# Altium PCB YYB_V2.PcbDoc
Units mm, origin at the board's own origin, x right, y up, seen from the top; angles counter-clockwise.
Board outline 18 x 410 mm, 2 copper layers (Top Layer, Bottom Layer); 123 components, 125 nets, 436 pads, 233 vias.
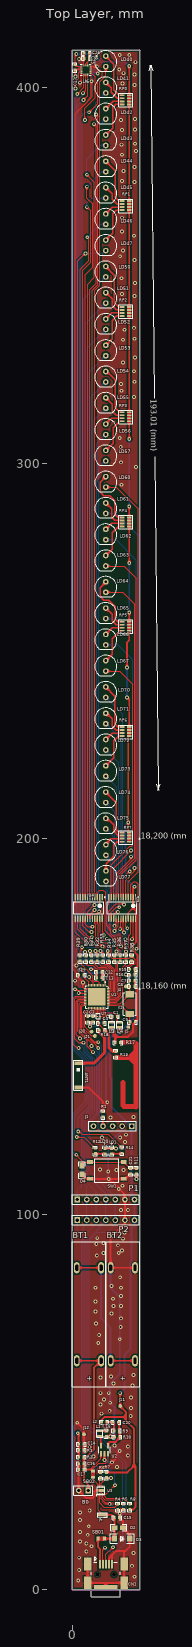
[diagram p0: Top Layer view]
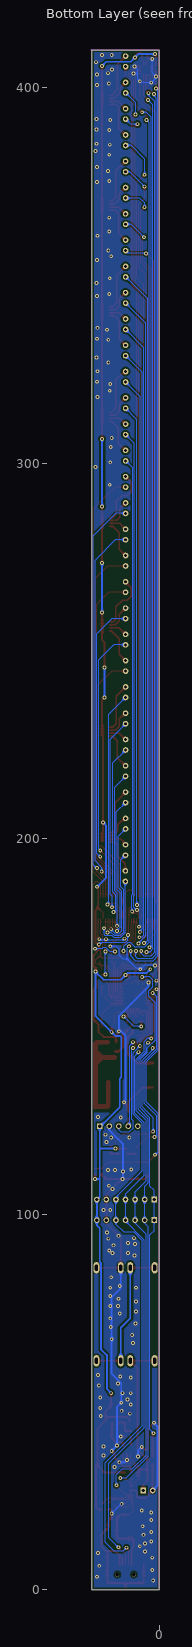
[diagram p1: Bottom Layer view, seen from below]

## Layer stack, top to bottom
Top Solder: solder mask 0.0102, Solder Resist, Dk 3.5
Top Layer: signal copper 0.0356
Dielectric1: dielectric 0.32, FR-4, Dk 4.8
Bottom Layer: signal copper 0.0356
Bottom Solder: solder mask 0.0102, Solder Resist, Dk 3.5

## Board outline
0,0 18,0 18,410 0,410

## Design rules (kind name [scope] priority, off if disabled: settings)
Clearance Poly [InPoly] p1: gap=0.508
Clearance [All] p2: gap=0.178
PolygonConnect via [IsVia] p1: connectstyle=Direct reliefconductorwidth=0.254 reliefentries=4 polygonreliefangle="90 Angle" airgapwidth=0.254
PolygonConnect [All] p2: connectstyle=Relief reliefconductorwidth=0.254 reliefentries=4 polygonreliefangle="90 Angle" airgapwidth=0.254
RoomDefinition power [InComponentClass('power')] p1: confinementstyle=ConfineIn formatcopy=TRUE lockcomponents=FALSE outline 0,-0.381 18.034,-0.381 18.034,105.537 0,105.537
RoomDefinition MCU_BT [InComponentClass('MCU_BT')] p2: confinementstyle=ConfineIn formatcopy=TRUE lockcomponents=FALSE outline 0,105.664 18,105.664 18,186.699 0,186.699
RoomDefinition Leds [InComponentClass('Leds')] p3: confinementstyle=ConfineIn formatcopy=TRUE lockcomponents=FALSE outline 0,187 18,187 18,409.956 0,409.956
RoutingVias [All] p1: holewidth=0.508 width=1.016 viastyle="Through Hole" minholewidth=0.381 minwidth=0.762 maxholewidth=0.711 maxwidth=1.27
SolderMaskExpansion [All] p1: expansion=0.102
Width [All] p1: maxlimit=2.54 minlimit=0.203 preferedwidth=0.254 minimp=50.000000 maximp=50.000000 favimp=50.000000
30 further rules are at their usual default settings.

## Classes and differential pairs
component class Leds: LD40 LD41 LD42 LD43 LD44 LD45 LD46 LD47 LD50 LD51 LD52 LD53 LD54 LD55 LD56 LD57 LD60 LD61 LD62 LD63 LD64 LD65 LD66 LD67 LD70 LD71 LD72 LD73 LD74 LD75 LD76 LD77 RP0 RP1 RP2 RP3 RP4 RP5 RP6 RP7 U4 U5
component class MCU_BT: ANT1 C1 C2 C3 C4 C7 C8 C9 C12 C13 C19 C21 C25 C26 C27 D4 J1 L3 L4 LD0 LD1 R1 R11 R12 R14 R15 R16 R17 R18 R19 R30 R31 R32 R33 R34 R35 R36 R37 R38 R39 SW1 U1 U6 U7 X1
component class power: B0 BT1 BT2 C14 C15 C16 C17 C18 C20 CN1 D2 D3 J4 J5 J6 J11 J12 J20 J21 L1 L2 P1 P2 R2 R3 R4 R5 R6 R7 R8 R9 R10 SB01 SB02 U2 U3

## Components (designator, comment, footprint, x,y, rotation, side; value= is the part's Value field where it differs from the comment)
ANT1 "ANTENNA" ANT-6520 1.651,140.208 r270 top
B0 "Header 2" HDR1X2 4.318,26.416 r180 top
BT1 "Battery" BAT 7.747,60.96 r90 top
BT2 "Battery" BAT 16.764,60.96 r90 top
C1 "1nF" 0603C 11.367,152.654 r0 top
C2 "47nF" 0603C 4.191,151.956 r90 top
C3 "2.2nF(4.7uF)" 0603C 5.588,151.956 r90 top
C4 "0.8pF" 0603C 7.81,150.876 r0 top
C7 "100nF" 0603C 16.066,162.179 r180 top
C8 "12pF" 0603C 16.066,160.655 r0 top
C9 "12pF" 0603C 16.129,151.13 r0 top
C12 "1uF(NC)" 0603C 7.302,164.465 r0 top
C13 "100nF" 0603C 7.302,162.941 r0 top
C14 "100nF" 0603C 2.476,38.735 r180 top
C15 "1uF" 0603C 11.938,19.177 r180 top
C16 "1uF" 0603C 2.476,33.528 r0 top
C17 "4.7uF" 0603C 2.476,32.004 r0 top
C18 "10uF" 0603C 9.144,41.529 r90 top
C19 "100nF" 0603C 2.476,163.703 r0 top
C20 "22pF" 0603C 11.684,44.577 r180 top
C21 "1nF" 0603C 15.621,111.442 r90 top
C25 "10uF" 0603C 3.873,407.797 r0 top
C26 "100nF" 0603C 3.873,409.194 r0 top
C27 "100nF" 0603C 0.762,405.384 r90 top
CN1 "5075BMR-05-SM" USB-MINI-B-SMD 9,4 r180 top
D2 "PESD5V0F1BL" 0805 11.303,16.51 r0 top
D3 "PZU5.6BL" SMA 13.335,13.589 r0 top
D4 "PESD5V0S1BA" 0805 2.667,112.903 r270 top
J1 "SWD" HDR1X5 15.875,123.444 r180 top
J4 "CON1" FIDUCAL_MARK_1MM 14.343,160.648 r0 top
J5 "CON1" FIDUCAL_MARK_1MM 14.978,149.726 r0 top
J6 "CON1" TAP-2.4X1 8.128,19.939 r90 top
J11 "CON1" FIDUCAL_MARK_1MM 12.834,48.887 r90 top
J12 "CON1" FIDUCAL_MARK_1MM 3.182,41.394 r90 top
J20 "CON1" FIDUCAL_MARK_1MM 5.214,148.582 r90 top
J21 "CON1" FIDUCAL_MARK_1MM 6.096,147.447 r90 top
L1 "VLS201610ET-2R2M(2.2uH)" VLS201610E 7.366,40.894 r90 top
L2 "Ferrite(WLCB1005D)" 0603 9.271,44.577 r180 top
L3 "10mH" VLS201610E 10.541,151.083 r270 top
L4 "10mH" VLS201610E 12.7,149.733 r90 top
LD0 "RED" 0603D 8.763,116.776 r90 top
LD1 "RED" 0603D 10.541,116.776 r90 top
LD40 "LED0" LED5 8.946,406.984 r270 top
LD41 "LED0" LED5 8.946,399.984 r270 top
LD42 "LED0" LED5 8.946,392.984 r270 top
LD43 "LED0" LED5 8.946,385.984 r270 top
LD44 "LED0" LED5 8.946,378.984 r270 top
LD45 "LED0" LED5 8.946,371.984 r270 top
LD46 "LED0" LED5 8.946,364.984 r270 top
LD47 "LED0" LED5 8.946,357.984 r270 top
LD50 "LED0" LED5 8.946,350.984 r270 top
LD51 "LED0" LED5 8.946,343.984 r270 top
LD52 "LED0" LED5 8.946,336.984 r270 top
LD53 "LED0" LED5 8.946,329.984 r270 top
LD54 "LED0" LED5 8.946,322.984 r270 top
LD55 "LED0" LED5 8.946,315.984 r270 top
LD56 "LED0" LED5 8.946,308.984 r270 top
LD57 "LED0" LED5 8.946,301.984 r270 top
LD60 "LED0" LED5 8.946,294.984 r270 top
LD61 "LED0" LED5 8.946,287.984 r270 top
LD62 "LED0" LED5 8.946,280.984 r270 top
LD63 "LED0" LED5 8.946,273.984 r270 top
LD64 "LED0" LED5 8.946,266.984 r270 top
LD65 "LED0" LED5 8.946,259.984 r270 top
LD66 "LED0" LED5 8.946,252.984 r270 top
LD67 "LED0" LED5 8.946,245.984 r270 top
LD70 "LED0" LED5 8.946,238.984 r270 top
LD71 "LED0" LED5 8.946,231.984 r270 top
LD72 "LED0" LED5 8.946,224.984 r270 top
LD73 "LED0" LED5 8.946,217.984 r270 top
LD74 "LED0" LED5 8.946,210.984 r270 top
LD75 "LED0" LED5 8.946,203.984 r270 top
LD76 "LED0" LED5 8.963,196.958 r270 top
LD77 "LED0" LED5 9,190 r270 top
P1 "Header 7" HDR1X7 1.397,103.886 r0 top
P2 "Header 7" HDR1X7 1.397,98.425 r0 top
R1 "10k" 0603R 8.255,126.555 r90 top
R2 "3M(1%)" 0603R 2.476,35.306 r180 top
R3 "1M(1%)" 0603R 2.476,37.211 r0 top
R4 "6k" 0603R 12.192,22.035 r90 top
R5 "4k" 0603R 13.716,22.035 r90 top
R6 "10k" 0603R 7.62,30.544 r270 top
R7 "10k" 0603R 9.144,30.544 r90 top
R8 "10k" 0603R 15.367,22.035 r270 top
R9 "665k(1%)" 0603R 11.874,42.291 r0 top
R10 "180k(1%)" 0603R 12.002,40.64 r180 top
R11 "10k" 0603R 17.145,111.442 r90 top
R12 "2k2" 0603R 6.223,116.84 r90 top
R14 "820R" 0603R 13.335,116.903 r90 top
R15 "10k" 0603R 16.066,165.227 r180 top
R16 "10k" 0603R 16.066,163.703 r180 top
R17 "0R" 0603R 12.195,145.669 r180 top
R18 "0R(NC)" 0603R 7.874,148.971 r180 top
R19 "0R" 0603R 11.684,142.621 r270 top
R30 "0R" 0603R 3.683,168.084 r90 top
R31 "0R" 0603R 5.207,168.084 r90 top
R32 "0R" 0603R 6.731,168.084 r90 top
R33 "0R" 0603R 8.255,168.084 r90 top
R34 "0R" 0603R 9.779,168.084 r90 top
R35 "0R" 0603R 11.303,168.084 r90 top
R36 "0R" 0603R 12.827,168.084 r90 top
R37 "0R" 0603R 14.351,168.084 r90 top
R38 "0R" 0603R 15.875,168.084 r90 top
R39 "0R" 0603R 2.159,168.084 r90 top
RP0 "470R" 4P8 13.399,397.967 r0 top
RP1 "470R" 4P8 13.399,369.773 r0 top
RP2 "470R" 4P8 13.399,341.617 r0 top
RP3 "470R" 4P8 13.399,313.55 r0 top
RP4 "470R" 4P8 13.399,285.572 r0 top
RP5 "470R" 4P8 13.399,257.759 r0 top
RP6 "470R" 4P8 13.399,229.692 r0 top
RP7 "470R" 4P8 13.399,201.587 r0 top
SB01 "Circuit Breaker" JP2_SMD 7.747,13.589 r180 top
SB02 "Circuit Breaker" JP2_SMD 5.588,30.702 r270 top
SW1 "Power" PB10 9.271,111.633 r0 top
U1 "NRF51822-QFAA" QFN48-0.4(NRF51822) 8.798,160.903 r270 top
U2 "TPS62260DDCR" SOT23-5 8.636,37.211 r0 top
U3 "BQ24040" DFN-10(BQ24040) 6.947,25.416 r0 top
U4 "TCA6416PW" TSSOP24_N 4.464,181.554 r270 top
U5 "TCA6416PW" TSSOP24_N 13.354,181.554 r270 top
U6 "LIS3DH" LGA16R50P7X5_300X300X100 3.683,404.749 r0 top
U7 "BAL-NRF01D3" BAL-NRF01D3 6.989,153.254 r270 top
X1 "8MHz(16pF)" 3SMXA 15.367,155.939 r270 top

## Footprints (in the part's own frame and the unit in brackets; to place one, negate y for a bottom-side part, rotate by r counter-clockwise, add the part's x,y. Pads: shape width x height; smd on the part's side, far side on the other; paste and mask are expansions set on the pad)
3SMXA [mm]
  rect 1.7x2.3 smd: 1(-2.65,0) 2(2.65,0)
  silkscreen extent -3,-1.75 3,1.75
4P8 [mil]
  rect 50x20 smd: 1(0,0) 2(0,-31.5) 3(0,-62.99) 4(0,-94.49) 5(72.49,-94.49) 6(72.49,-62.99) 7(72.49,-31.5) 8(72.49,0)
  silkscreen extent -36,-120 108,20
0603 [mil]
  rect 30x30 smd: 1(0,0) 2(55,0)
  silkscreen extent -21,-21 76,21
0603C [mil]
  rect 30x30 smd: 1(27.5,0) 2(-27.5,0)
  silkscreen extent -50,-20 50,20
0603D [mil]
  rect 30x30 smd: 1(27.5,0) 2(-27.5,0)
  silkscreen extent -50,-25 55,25
0603R [mil]
  rect 30x30 smd: 1(27.5,0) 2(-27.5,0)
  silkscreen extent -50,-20 50,20
0805 [mil]
  rect 60x50 smd: 1(0,0) 2(90,0)
  silkscreen extent -40,-35 130,35
ANT-6520 [mm]
  rect 1x2.1 smd: 1(0,0) 2(6.5,0)
  silkscreen extent -0.75,-1.25 7.25,1.25
BAL-NRF01D3 [mm]
  round 0.22 smd: 1(0,-0.25) 2(0,0.25) 3(0.6,-0.25) 4(0.6,0.25) 5(1.033,0)
  silkscreen extent -0.23,-0.51 1.24,0.51
BAT [mil]
  oval 118.11x60 hole 30 slot 62.99 at 0 deg: 1(0,255) 1(0,0) 2(975,0) 2(975,255)
  silkscreen extent -275,-50 1250,300
DFN-10(BQ24040) [mm]
  rect 0.23x0.7 smd: 1(0,0) 2(0.4,0) 3(0.8,0) 4(1.2,0) 5(1.6,0) 6(1.6,2) 7(1.2,2) 8(0.8,2) 9(0.4,2) 10(0,2)
  rect 1.5x0.7 smd: 11(0.8,1)
  silkscreen extent -0.5,-0.4 1.8,2
FIDUCAL_MARK_1MM [mm]
  round 1 smd: 1(0.008,0.007)
HDR1X2 [mm] "Connector; Header; 2 Position"
  rect 1.5x1.5 hole 0.9: 1(0,0)
  round 1.5 hole 0.9: 2(2.54,0)
  silkscreen extent -1.27,-1.27 3.81,1.27
HDR1X5 [mm] "Connector; Header; 5 Position"
  rect 1.5x1.5 hole 0.9: 1(0,0)
  round 1.5 hole 0.9: 2(2.54,0) 3(5.08,0) 4(7.62,0) 5(10.16,0)
  silkscreen extent -1.27,-1.27 11.43,1.27
HDR1X7 [mm] "Connector; Header; 7 Position"
  rect 1.5x1.5 hole 0.9: 1(0,0)
  round 1.5 hole 0.9: 2(2.54,0) 3(5.08,0) 4(7.62,0) 5(10.16,0) 6(12.7,0) 7(15.24,0)
  silkscreen extent -1.27,-1.27 16.51,1.27
JP2_SMD [mil]
  rect 32x40 smd: 1(33.75,0) 2(-33.75,0)
  Top Layer region: 23.75,20 13.75,20 -6.25,0 13.75,-20 23.75,-20
  Top Layer region: -26.25,0 -16.25,0 3.75,20 -26.25,20
  Top Layer region: -26.25,0 -16.25,0 3.75,-20 -26.25,-20
LED5 [mm]
  round 1.5 hole 0.762: 1(-1.416,0.054) 2(1.378,0.054)
  silkscreen extent -2.84,-2.89 2.58,3
LGA16R50P7X5_300X300X100 [mm]
  rect 0.55x0.3 smd paste-25.4 mask-25.4: 1(-1.2,1) 2(-1.2,0.5) 3(-1.2,0) 4(-1.2,-0.5) 5(-1.2,-1) 9(1.2,-1) 10(1.2,-0.5) 11(1.2,0) 12(1.2,0.5) 13(1.2,1)
  rect 0.3x0.55 smd paste-25.4 mask-25.4: 6(-0.5,-1.2) 7(0,-1.2) 8(0.5,-1.2) 14(0.5,1.2) 15(0,1.2) 16(-0.5,1.2)
  silkscreen extent -1.5,-1.5 1.5,1.5
PB10 [mil]
  rect 60x40 smd: 1(-177.17,-87.5) 2(-177.17,87.5) 3(177.17,87.5)
  rect 55x40 smd: 4(177.17,-87.5)
  silkscreen extent -125,-125 125,125
QFN48-0.4(NRF51822) [mm]
  oval 0.65x0.2 smd: 1(0,0) 2(0,-0.4) 3(0,-0.8) 4(0,-1.2) 5(0,-1.6) 6(0,-2) 7(0,-2.4) 8(0,-2.8) 9(0,-3.2) 10(0,-3.6) 11(0,-4) 12(0,-4.4) 25(6.05,-4.4) 26(6.05,-4) 27(6.05,-3.6) 28(6.05,-3.2) 29(6.05,-2.8) 30(6.05,-2.4) 31(6.05,-2) 32(6.05,-1.6) 33(6.05,-1.2) 34(6.05,-0.8) 35(6.05,-0.4) 36(6.05,0)
  oval 0.2x0.65 smd: 13(0.825,-5.225) 14(1.225,-5.225) 15(1.625,-5.225) 16(2.025,-5.225) 17(2.425,-5.225) 18(2.825,-5.225) 19(3.225,-5.225) 20(3.625,-5.225) 21(4.025,-5.225) 22(4.425,-5.225) 23(4.825,-5.225) 24(5.225,-5.225) 37(5.225,0.825) 38(4.825,0.825) 39(4.425,0.825) 40(4.025,0.825) 41(3.625,0.825) 42(3.225,0.825) 43(2.825,0.825) 44(2.425,0.825) 45(2.025,0.825) 46(1.625,0.825) 47(1.225,0.825) 48(0.825,0.825)
  rect 4.6x4.6 smd: 49(3.025,-2.2)
  silkscreen extent -1,-5.2 6.02,0.8
SMA [mm]
  rect 1.4x1.64 smd: 1(-2.032,0) 2(2.032,0)
  silkscreen extent -3.17,-1.27 3.17,1.27
SOT23-5 [mm] "SOT-23/SC-74A; 5 Leads; Body 3 x 3 mm, inc. leads (LxW max)"
  rect 0.55x1.45 smd: 1(-0.95,-1.075) 2(0,-1.075) 3(0.95,-1.075) 4(0.95,1.075) 5(-0.95,1.075)
  silkscreen extent -1.57,-1.35 1.55,0.9
TAP-2.4X1 [mm]
  rect 1x2.4 smd: 1(0,0)
  silkscreen extent -0.6,-1.3 0.6,1.3
TSSOP24_N [mm] "TSOP, 24-Leads, Body 7.8x4.4mm, Pitch 0.65mm, IPC Medium Density"
  oval 1.7x0.35 smd: 1(-2.85,3.575) 2(-2.85,2.925) 3(-2.85,2.275) 4(-2.85,1.625) 5(-2.85,0.975) 6(-2.85,0.325) 7(-2.85,-0.325) 8(-2.85,-0.975) 9(-2.85,-1.625) 10(-2.85,-2.275) 11(-2.85,-2.925) 12(-2.85,-3.575) 13(2.85,-3.575) 14(2.85,-2.925) 15(2.85,-2.275) 16(2.85,-1.625) 17(2.85,-0.975) 18(2.85,-0.325) 19(2.85,0.325) 20(2.85,0.975) 21(2.85,1.625) 22(2.85,2.275) 23(2.85,2.925) 24(2.85,3.575)
  silkscreen extent -2.97,-3.95 1.6,4.43, body extent -2.25,-3.95 2.25,3.95, height 1.1
USB-MINI-B-SMD [mm]
  round 1 hole 1 unplated: 0(-2.2,0) 0(2.194,0)
  rect 0.508x2.3 smd: 1(1.597,-2.75) 2(0.797,-2.75) 3(-0.003,-2.75) 4(-0.803,-2.75) 5(-1.603,-2.75)
  rect 2x3.5 smd: 6(-4.853,-2.8) 6(-4.853,2.2) 6(4.847,-2.8) 6(4.847,2.2)
  rect 6.2x1.2 smd: 6(0,3.35)
  silkscreen extent -3.85,-4.76 3.85,5.9
VLS201610E [mm]
  rect 0.65x1.6 smd: 1(0,0) 2(1.35,0)
  silkscreen extent -0.33,-0.8 1.68,0.8

## Part data
ANT1: "Generic Antenna"
B0: "Header, 2-Pin"
BT1 BT2: "Multicell Battery"
C1 C2 C3 C4 C7 C8 C9 C12 C13 C14 C15 C16 C17 C18 C19 C20 C21 C25 C26 C27: library part CAP, "Capacitor"
CN1: library part "USB-MINI-typeB connector", "USB-MINI-typeB connector"
D2 D4: library part ESD
D3: library part DIODE
J1: library part CON5, "Connector"
J4 J5 J6 J11 J12 J20 J21: "Connector"
L1 L2 L3 L4: library part INDUCTOR
LD0 LD1: library part PHOTO
LD40 LD41 LD42 LD43 LD44 LD45 LD46 LD47 LD50 LD51 LD52 LD53 LD54 LD55 LD56 LD57 LD60 LD61 LD62 LD63 LD64 LD65 LD66 LD67 LD70 LD71 LD72 LD73 LD74 LD75 LD76 LD77: "Typical INFRARED GaAs LED"
P1 P2: "Header, 7-Pin"
R1 R2 R3 R4 R5 R6 R7 R8 R9 R10 R11 R15 R16 R17 R18 R19: library part RES2
R12: library part R0402-2k2, "Resistor, ?%, 0.063W"
R14: library part R0402-820, "Resistor, ?%, 0.063W"
R30 R31 R32 R33 R34 R35 R36 R37 R38 R39: library part Res3, "Resistor"
RP0 RP1 RP2 RP3 RP4 RP5 RP6 RP7: library part RESPACK3_1
SW1: library part "SW PUSHBUTTON", "SE PUSHBUTTON"
U1: library part NRF51822
U2: library part TPS62261
X1: library part CRYSTAL, "Crystal"

## Via types
v1: diameter 1.016, hole 0.508, Top Layer to Bottom Layer, 233 vias

## Nets (pads, with @x,y where several pads share a name; then routed paths per layer and width w, separated by ;. In a path a pad name is that pad's centre, name@x,y a point inside that pad or via, vN(x,y) a via of type N, cw(c..) or ccw(c..) an arc to the next point about the centre after c; other vN are vias at no path point)
+2.8V: C12.1 C13.1 C19.1 C25.1 C26.1 C27.1 J1.1 J11.1 L2.2 L4.1 LD0.1 LD1.1 P1.7 P2.7 R7.1 R8.1 R11.2 R15.2 R16.2 RP0.5 RP0.6 RP0.7 RP0.8 RP1.5 RP1.6 RP1.7 RP1.8 RP2.5 RP2.6 RP2.7 RP2.8 RP3.5 RP3.6 RP3.7 RP3.8 RP4.5 RP4.6 RP4.7 RP4.8 RP5.5 RP5.6 RP5.7 RP5.8 RP6.5 RP6.6 RP6.7 RP6.8 RP7.5 RP7.6 RP7.7 RP7.8 U1.1 U1.12 U4.2 U4.24 U5.2 U5.21 U5.24 U6.1 U6.14 U6.15 | length 508.9
  Top Layer w0.203: v1(2.413,165.227) 3.365,164.274 3.365,162.877 4.398,161.845 U1.12 ; C13.1 8.798,162.144 U1.1
  Top Layer w0.305: v1(1.143,408.94) 0.889,408.686 0.889,405.892 1.032,405.749 U6.1 ; U6.15 3.683,406.4 4.127,406.844 ; U6.14 4.183,406.789 4.127,406.844 ; v1(6.477,408.051) 6.477,408.686 5.969,409.194 C26.1 C25.1 4.572,407.289 4.127,406.844 ; U4.2 7.389,182.095 8.077,181.407 8.077,178.742 U4.24 8.039,177.889 8.128,177.8 8.128,174.625 v1(8.382,174.371) ; U5.21 14.979,180.287 16.279,181.587
  Top Layer w0.508: L2.2 7.874,45.212 8.636,45.974 14.351,45.974 ; C13.1 8.001,163.703 ; C12.1 8.001,163.703 ; LD0.1 LD1.1 v1(11.684,117.475) ; v1(9.017,163.703) 8.001,163.703 ; R7.1 14.732,31.242 16.51,33.02 ; v1(12.7,148.463) L4.1 ; v1(12.827,52.324) J11.1 14.351,47.371 14.351,45.974 ; v1(14.605,237.617) 15.24,236.982 RP6.8 RP6.7 RP6.6 RP6.5 14.986,227.038 v1(14.986,204.343) 14.986,201.841 RP7.8 RP7.7 RP7.6 RP7.5 ; v1(14.605,245.618) 14.605,252.222 15.24,252.857 RP5.5 RP5.6 RP5.7 RP5.8 v1(15.24,260.223) ; v1(15.24,273.431) RP4.5 RP4.6 RP4.7 RP4.8 v1(15.24,288.417) ; v1(15.24,306.451) RP3.5 RP3.6 RP3.7 RP3.8 RP2.5 RP2.6 RP2.7 RP2.8 RP1.5 RP1.6 RP1.7 RP1.8 RP0.5 RP0.6 RP0.7 RP0.8 v1(15.24,405.765) ; R8.1 16.256,21.336 16.891,21.971 16.891,32.639 16.51,33.02 ; v1@16.637,187.071 16.279,186.713 U5.2 16.279,181.587 17.011,180.855 17.011,172.459 16.129,171.577 16.129,170.375 17.493,169.011 17.493,165.989 16.764,165.26 R15.2 R16.2 ; v1(17.145,109.347) R11.2 ; 14.351,45.974 14.351,44.958 16.51,42.799 16.51,33.02
  Bottom Layer w0.305: v1(8.382,174.371) 8.382,172.974 9.144,172.212 v1@15.875,172.212
  Bottom Layer w0.508: v1(1.143,408.94) 5.588,408.94 v1(6.477,408.051) 7.62,406.908 14.097,406.908 v1(15.24,405.765) ; v1(2.413,165.227) 3.429,164.211 8.509,164.211 v1(9.017,163.703) 10.287,162.433 14.859,162.433 v1(17.018,164.592) 17.018,152.781 v1(12.7,148.463) 11.684,147.447 10.541,147.447 10.16,147.066 10.16,136.398 10.541,136.017 10.541,128.524 15.621,123.444 J1.1 15.875,117.602 ; v1(11.684,117.475) 15.748,117.475 15.875,117.602 ; v1(12.827,52.324) 13.97,53.467 13.97,62.484 15.57,64.084 15.57,86.957 15.875,87.262 15.875,96.266 16.637,97.028 P2.7 P1.7 15.875,104.648 15.875,109.22 ; v1(14.605,237.617) v1(14.605,245.618) ; v1(14.986,204.343) 14.224,203.581 14.224,189.484 16.51,187.198 v1(16.637,187.198) ; v1(15.24,260.223) v1(15.24,273.431) ; v1(15.24,288.417) v1(15.24,306.451) ; v1(17.145,109.347) 16.002,109.347 15.875,109.22 ; 15.875,109.22 15.875,117.602
  other v1: 16.129,171.831
AGND: C1.2 C2.2 C3.2 C4.1 L3.1 U1.33 U1.34 U7.4 | length 20.6
  Top Layer w0.203: C2.2 4.826,151.257 ; v1(4.826,149.987) 4.826,151.257 ; C3.2 4.826,151.257 ; U7.4 8.636,152.654 ; U1.33 7.598,153.692 8.636,152.654 ; U1.34 7.998,153.769 v1@9.113,152.654 ; C4.1 8.509,152.527 8.636,152.654 ; L3.1 10.668,151.21 C1.2 v1(9.525,152.654) v1@9.113,152.654 ; 8.636,152.654 v1@9.113,152.654
  Bottom Layer w0.203: v1(4.826,149.987) 6.858,149.987 v1(9.525,152.654)
AVDD: C1.1 L4.2 U1.35 U1.36 | length 8.3
  Top Layer w0.203: U1.35 8.398,153.908 8.636,153.67 ; U1.36 8.798,153.832 8.636,153.67 ; L4.2@12.065,150.876 C1.1 12.065,152.908 11.303,153.67 8.636,153.67
BATTARY_ADC_IN: C14.1 P1.1 P2.1 R2.1 R3.2 U1.9 | length 138.2
  Top Layer w0.203: v1(4.572,163.195) 4.572,162.687 5.598,161.661 U1.9
  Top Layer w0.508: v1(1.524,41.656) 1.778,41.402 C14.1 R3.2 R2.1
  Bottom Layer w0.203: v1(1.524,41.656) 2.54,42.672 2.54,94.488 1.397,95.631 P2.1 P1.1 1.397,106.299 2.54,107.442 2.54,125.73 5.08,128.27 5.08,141.224 3.175,143.129 3.175,144.272 1.116,146.331 1.116,156.31 2.794,157.988 2.794,159.512 1.778,160.528 1.778,162.433 2.54,163.195 v1(4.572,163.195)
CHG_STAT: P1.2 P2.2 R7.2 U1.19 U3.8 | length 143.5
  Top Layer w0.203: v1(3.048,145.669) 1.778,145.669 0.735,146.712 0.735,157.326 1.087,157.678 U1.19 ; U3.8 7.747,28.321 9.144,29.718 R7.2 9.271,29.718 v1(10.414,29.718)
  Bottom Layer w0.203: v1(3.048,145.669) 3.556,145.161 3.556,143.287 5.588,141.255 5.588,127.889 3.023,125.324 3.023,108.356 3.937,107.442 P1.2 P2.2 3.937,97.536 3.023,96.622 3.023,35.585 8.89,29.718 v1(10.414,29.718)
GND: ANT1.2 B0.2 BT2.2 C7.2 C8.1 C9.1 C12.2 C13.2 C14.2 C15.2 C16.2 C17.2 C18.2 C19.2 C21.2 C25.2 C26.2 C27.2 CN1.4 CN1.5 CN1.6 D2.2 D3.2 D4.2 J1.2 J12.1 L3.2 P1.6 P2.6 R1.1 R3.1 R4.2 R5.2 R6.2 R10.1 R17.1 SW1.1 SW1.4 U1.13 U1.49 U2.2 U3.3 U3.11 U4.12 U4.21 U5.12 U6.2 U6.3 U6.5 U6.10 U6.12 U6.13 U6.16 | length 636.2
  Top Layer w0.203: v1(2.921,161.671) 2.921,160.401 3.244,160.078 U1.13 4.398,160.078 U1.49 ; U3.11 U3.3 7.747,24.257 9.144,22.86 v1(10.033,22.86)
  Top Layer w0.254: 0.889,182.602 0.38,182.093 0.38,165.101 C19.2 1.778,162.814 v1(2.921,161.671)
  Top Layer w0.305: 0.405,166.243 v1(1.143,166.243) ; 0.889,182.602 U4.12 0.889,393.065 5.08,397.256 5.08,401.574 v1(5.207,401.701) ; v1(0.889,402.971) 0.889,404.495 1.143,404.749 1.397,404.749 ; v1(1.905,407.67) 2.032,407.797 C25.2 ; v1(2.159,401.32) 2.483,401.644 U6.5 ; U6.3 1.397,404.749 ; U6.2 1.897,405.249 1.397,404.749 ; C26.2 3.183,409.186 U6.16 ; U6.10 6.342,404.249 v1(6.858,403.733) ; U6.12 v1@6.596,405.249 ; U6.13 v1@6.366,405.749 ; v1(5.08,165.227) 5.842,165.227 C12.2 C13.2 ; U4.21 6.089,177.299 6.35,177.038 6.35,173.101 v1(8.128,171.323) ; U5.12 9.779,182.499 9.271,181.991 9.271,176.784 10.287,175.768 10.287,174.71 13.081,171.916 v1(13.081,171.323)
  Top Layer w0.508: v1(1.397,44.45) 3.175,42.672 J12.1 C14.2 R3.1 3.937,37.211 v1(4.699,37.973) ; ANT1.2 4.468,133.708 8.255,129.921 8.255,128.397 ; C16.2 C17.2 B0.2 3.81,24.384 5.461,24.384 5.969,24.892 5.969,26.035 6.35,26.416 U3.11 ; D4.2 3.873,109.41 SW1.1 v1@9.779,109.41 ; CN1.6@4.153,6.8 4.153,1.8 9.003,1.8 ; R6.2 7.62,32.512 7.874,32.766 9.525,32.766 v1(10.668,33.909) 11.938,35.179 11.938,36.195 v1(12.7,36.957) ; R1.1 8.255,128.397 ; v1(8.636,34.544) U2.2 ; CN1.6@9,0.65 9,1.797 9.003,1.8 ; C18.2@9.271,40.767 v1(10.287,40.767) 10.858,40.767 R10.1@10.986,40.64 ; v1@9.398,129.667 v1(9.398,129.794) ; v1@9.525,129.667 8.255,128.397 ; CN1.4 9.803,8.406 10.541,9.144 ; L3.2 10.541,148.717 v1(10.795,148.717) 10.795,148.463 11.497,147.761 ; CN1.5 10.603,9.082 10.541,9.144 ; R17.1 11.497,147.761 ; R5.2 12.7,21.336 12.636,21.273 C15.2 13.589,18.224 D2.2 15.367,14.732 D3.2 15.367,11.43 14.224,10.287 13.843,10.287 ; C21.2 14.287,109.41 SW1.4 v1@9.779,109.41 ; BT2.2@16.764,85.725 10.287,85.725 10.287,93.726 14.097,97.536 P2.6 P1.6 14.097,105.283 10.795,108.585 10.287,108.585 10.287,108.902 v1@9.779,109.41 ; C7.2 C8.1 16.764,160.495 17.493,159.766 17.493,151.796 C9.1 16.256,150.558 16.256,148.59 14.859,147.193 12.065,147.193 11.497,147.761 ; 9.003,1.8 13.853,1.8 13.853,6.8 13.853,10.277 13.843,10.287 ; 10.541,9.144 11.684,10.287 13.843,10.287
  Bottom Layer w0.203: v1(10.033,22.86) 10.16,22.86 v1(12.7,20.32)
  Bottom Layer w0.305: v1(1.143,166.243) 4.064,166.243 4.826,165.481 6.096,165.481 8.509,167.894 ; v1(1.905,407.67) 1.905,403.987 v1(0.889,402.971) 0.889,402.59 v1(2.159,401.32) 4.826,401.32 v1(5.207,401.701) 5.715,402.209 5.715,403.733 ; v1(6.604,405.638) 5.715,404.749 5.715,403.733 ; v1(6.858,403.733) 5.715,403.733 ; v1(8.128,171.323) 8.509,170.942 8.509,167.894 ; v1(13.081,171.323) 11.43,171.323 10.668,170.561 10.668,168.91 9.652,167.894 8.509,167.894
  Bottom Layer w0.508: v1(1.397,44.45) 0.507,43.56 0.507,27.687 B0.2 ; v1(2.921,161.671) 2.921,160.587 10.795,152.713 10.795,149.352 9.017,147.574 9.017,130.175 v1(9.398,129.794) ; v1(4.699,37.973) 5.715,36.957 v1(5.715,35.433) ; v1(8.636,34.544) 9.271,33.909 v1(10.668,33.909) ; v1(9.779,109.347) 9.652,109.474 v1(9.652,111.379) 9.652,118.618 13.335,122.301 J1.2 ; v1(10.287,40.767) 11.176,40.767 11.303,40.894 ; BT2.2@10.287,85.725 10.287,80.264 12.7,77.851 v1(12.7,66.675) 12.7,57.531 10.16,54.991 v1(10.16,49.784) 11.303,48.641 11.303,40.894 ; v1(12.7,36.957) v1(11.303,38.354) 11.303,40.894
  other v1: 1.651,2.413 16.637,3.429 1.905,5.207 16.002,6.35 1.905,8.509 16.383,9.779 3.81,10.16 5.207,11.557 3.81,12.319 2.159,12.827 4.191,14.605 2.159,15.367 4.445,16.891 2.159,18.542 2.159,20.574 4.699,21.082 11.938,32.639 14.859,35.687 14.859,38.1 15.621,46.228 7.874,46.863 10.033,47.625 15.748,48.387 7.62,49.276 8.509,50.673 15.748,51.181 7.62,52.324 9.779,52.324 16.129,54.356 11.049,54.864 7.62,56.515 10.414,56.769 16.383,57.15 6.985,65.659 7.239,67.818 12.954,69.977 6.35,70.866 13.081,72.263 10.541,73.533 6.223,74.041 11.049,75.565 13.081,75.565 6.223,76.708 10.922,77.47 13.081,78.232 6.223,80.391 13.081,80.391 10.541,80.899 12.827,83.185 6.604,89.027 8.382,89.662 12.446,89.662 13.335,90.297 12.192,91.694 6.477,92.075 8.382,92.329 13.589,93.472 6.731,93.599 10.922,94.234 13.97,95.123 13.081,101.092 14.859,101.092 12.446,106.68 13.462,107.569 11.811,111.76 13.716,111.76 7.493,111.887 14.097,119.253 8.001,120.396 12.827,120.396 14.351,121.158 10.287,125.73 16.383,125.857 0.762,162.179 13.208,294.259 17.018,298.958 13.081,300.228 12.954,304.292 12.7,306.705 16.51,317.627 13.208,319.278 13.081,321.056 16.637,321.691 16.51,324.485 13.589,326.771 16.764,328.168 13.589,332.867 16.637,333.121 13.97,335.534 16.51,336.042 16.637,344.551 13.335,345.059 16.764,347.98 13.208,349.25 16.637,354.076 12.827,355.092 13.589,356.616 16.51,360.553 13.335,361.696 13.335,365.379 16.637,374.904 13.335,375.158 13.716,377.825 16.637,378.841 13.335,382.143 17.018,383.159 13.208,384.81 16.764,385.064 13.335,388.747 16.764,388.874 13.081,391.414 16.764,391.668 16.637,400.685 13.462,401.066 16.637,403.479 13.716,403.86 12.573,404.876 16.891,406.781 12.7,408.686 15.24,408.686
I2C_SCL: R15.1 R38.1 U4.22 U5.22 | length 34.7
  Top Layer w0.254: 10.465,170.307 10.465,168.392 10.76,168.097 15.189,168.097 R38.1
  Top Layer w0.305: 6.782,177.673 6.782,178.661 U4.22 6.739,177.411 6.985,177.165 6.985,173.355 8.001,172.339 9.144,172.339 10.465,171.018 10.465,170.307 ; R15.1 15.367,165.735 16.129,166.497 16.637,166.497 16.891,166.751 16.891,167.767 R38.1 15.545,169.113 15.545,170.51 15.113,170.942 15.113,174.117 15.629,174.633 U5.22
I2C_SDA: R16.1 R37.1 U4.23 U5.23 | length 32.9
  Top Layer w0.305: U4.23 7.389,177.443 7.544,177.289 7.544,173.558 8.128,172.974 8.89,172.974 v1(9.271,173.355) ; v1(14.224,173.228) 14.351,173.101 v1(14.351,169.926) R37.1 ; v1(14.351,163.83) 14.478,163.703 R16.1 R16.1@15.494,163.703 ; v1(16.002,173.228) 16.279,173.505 U5.23
  Bottom Layer w0.305: v1(9.271,173.355) 9.271,173.228 9.525,172.974 13.589,172.974 ; v1(14.224,173.228) 13.843,173.228 13.589,172.974 ; v1(14.351,163.83) v1(14.351,169.926) ; v1(16.002,173.228) 16.002,173.101 16.129,172.974 13.589,172.974
IO_EXP0_INT: U4.1
IO_EXP0_RST: R36.1 U4.3 | length 22.7
  Top Layer w0.305: U4.3 6.739,185.682 7.366,186.309 8.331,186.309 8.966,185.674 8.966,182.369 8.788,182.191 8.788,175.489 12.065,172.212 12.065,170.857 12.827,170.095 R36.1
IO_EXP1_INT: U5.1
IO_EXP1_RST: R35.1 U5.3 | length 30.4
  Top Layer w0.305: R35.1 11.811,169.291 v1(11.811,169.926) ; U5.3 15.629,187.714 16.383,188.468 16.96,188.468 17.595,187.833 17.595,171.138 v1(17.145,170.688)
  Bottom Layer w0.305: v1(11.811,169.926) 13.081,169.926 14.097,170.942 15.113,170.942 15.367,170.688 v1(17.145,170.688)
KEY_IN: C21.1 D4.1 R11.1 SW1.2 SW1.3 U1.14 | length 68.9
  Top Layer w0.203: v1(0.762,159.893) 0.977,159.678 U1.14 ; v1(1.143,115.824) 1.143,115.697 2.984,113.855 ; D4.1 2.667,113.538 2.984,113.855 ; R11.1 C21.1 15.486,112.141 SW1.3 SW1.2 2.984,113.855
  Bottom Layer w0.203: v1(0.762,159.893) 0.354,159.485 0.354,143.791 3.556,140.589 3.556,129.921 0.354,126.719 0.354,116.486 1.016,115.824 v1(1.143,115.824)
LED00: LD40.2 U4.4 | length 222.4
  Top Layer w0.254: U4.4 6.089,346.08 7.366,347.357 7.366,401.574 9,403.208 LD40.2
LED01: LD41.2 U4.5 | length 216.1
  Top Layer w0.254: U4.5 5.439,346.04 6.909,347.51 6.909,392.252 v1(6.35,392.811)
  Bottom Layer w0.254: v1(6.35,392.811) 6.35,395.956 LD41.2
LED02: LD42.2 U4.6 | length 210.5
  Top Layer w0.254: U4.6 4.789,346.165 6.477,347.853 6.477,389.636 v1(5.842,390.271)
  Bottom Layer w0.254: v1(5.842,390.271) 7.665,390.271 LD42.2
LED03: LD43.2 U4.7 | length 204.8
  Top Layer w0.254: v1(3.937,376.809) 5.969,374.777 5.969,349.504 4.139,347.674 U4.7
  Bottom Layer w0.254: v1(3.937,376.809) 3.937,381 7.543,384.606 LD43.2
LED04: LD44.2 U4.8 | length 197.4
  Top Layer w0.254: U4.8 3.489,350.199 5.461,352.171 5.461,369.062 3.937,370.586 v1(3.937,373.634)
  Bottom Layer w0.254: v1(3.937,373.634) 7.909,377.606 LD44.2
LED05: LD45.2 U4.9 | length 191.8
  Top Layer w0.254: U4.9 2.839,351.327 4.953,353.441 4.953,367.157 v1(3.937,368.173)
  Bottom Layer w0.254: v1(3.937,368.173) 3.937,369.316 5.227,370.606 LD45.2
LED06: LD46.2 U4.10 | length 183.2
  Top Layer w0.254: U4.10 2.189,351.693 4.445,353.949 4.445,359.791 v1(4.064,360.172)
  Bottom Layer w0.254: v1(4.064,360.172) 7.498,363.606 LD46.2
LED07: LD47.2 U4.11 | length 178
  Top Layer w0.254: U4.11 1.539,353.837 v1(3.556,355.854)
  Bottom Layer w0.254: v1(3.556,355.854) 8.248,355.854 LD47.2
LED10: LD50.2 U4.13 | length 188.3
  Top Layer w0.305: U4.13 0.889,175.133 3.81,172.212 v1(4.064,172.212)
  Bottom Layer w0.305: v1(4.064,172.212) 3.81,172.212 3.15,172.872 3.15,343.756 LD50.2
LED11: LD51.2 U4.14 | length 182
  Top Layer w0.305: U4.14 1.539,175.88 4.115,173.304 4.411,173.304 5.588,172.127 v1(5.588,172.085)
  Bottom Layer w0.305: v1(5.588,172.085) 4.855,172.818 4.855,172.898 3.632,174.12 3.632,337.238 LD51.2
LED12: LD52.2 U4.15 | length 171.6
  Top Layer w0.305: U4.15 2.189,175.992 4.394,173.787 5.283,173.787 v1(5.334,173.736)
  Bottom Layer w0.305: v1(5.334,173.736) 4.699,173.736 4.115,174.32 4.115,330.721 LD52.2
LED13: LD53.2 U4.16 | length 160.5
  Top Layer w0.305: U4.16 2.839,176.866 4.572,175.133 v1(5.207,175.133)
  Bottom Layer w0.305: v1(5.207,175.133) 5.207,175.345 4.597,175.954 4.597,324.203 LD53.2
LED14: LD54.2 U4.17 | length 150.6
  Top Layer w0.305: U4.17 3.489,177.232 4.191,176.53 v1(5.461,176.53)
  Bottom Layer w0.305: v1(5.461,176.53) 5.08,176.911 5.08,317.686 LD54.2
LED15: LD55.2 U4.18 | length 137.9
  Top Layer w0.305: U4.18 4.139,180.542 v1(5.969,182.372)
  Bottom Layer w0.305: v1(5.969,182.372) 5.969,311.575 LD55.2
LED16: LD56.2 U4.19 | length 130.9
  Top Layer w0.305: U4.19 4.789,179.795 v1(5.969,180.975)
  Bottom Layer w0.305: v1(5.969,180.975) 6.096,180.975 6.807,181.686 6.807,184.788 6.629,184.966 6.629,305.235 LD56.2
LED17: LD57.2 U4.20 | length 124.1
  Top Layer w0.305: U4.20 5.439,179.683 5.766,180.01 6.655,180.01 v1(7.239,180.594)
  Bottom Layer w0.305: v1(7.239,180.594) 7.341,180.696 7.341,184.937 7.112,185.166 7.112,298.718 LD57.2
LED20: LD60.2 U5.4 | length 115.5
  Top Layer w0.254: LD60.2 11.829,293.606 17.595,287.84 17.595,191.204 14.979,188.588 U5.4
LED21: LD61.2 U5.5 | length 108.6
  Top Layer w0.254: U5.5 14.329,188.954 16.637,191.262 v1(16.637,192.151)
  Bottom Layer w0.254: LD61.2 11.59,286.606 17.595,280.601 17.595,193.109 v1(16.637,192.151)
LED22: LD62.2 U5.6 | length 101.6
  Top Layer w0.254: U5.6 13.679,189.574 v1(15.367,191.262)
  Bottom Layer w0.254: LD62.2 11.732,279.606 17.138,274.2 17.138,194.056 15.367,192.285 v1(15.367,191.262)
LED23: LD63.2 U5.7 | length 96.1
  Top Layer w0.254: LD63.2 13.906,272.606 17.138,269.374 17.138,194.43 13.029,190.321 U5.7
LED24: LD64.2 U5.8 | length 88.8
  Top Layer w0.254: LD64.2 13.54,265.606 16.68,262.466 16.68,194.734 12.379,190.433 U5.8
LED25: LD65.2 U5.9 | length 81.6
  Top Layer w0.254: U5.9 11.729,190.672 15.748,194.691 v1(15.748,195.199)
  Bottom Layer w0.254: LD65.2 12.666,258.606 16.68,254.592 16.68,196.131 v1(15.748,195.199)
LED26: LD66.2 U5.10 | length 74.1
  Top Layer w0.254: U5.10 11.079,192.181 v1(15.748,196.85)
  Bottom Layer w0.254: LD66.2 12.173,251.606 16.129,247.65 16.129,197.231 v1(15.748,196.85)
LED27: LD67.2 U5.11 | length 68.1
  Top Layer w0.254: LD67.2 12.696,244.606 16.223,241.079 16.223,198.341 15.875,197.993 15.367,197.993 10.429,193.055 U5.11
LED30: LD70.2 U5.13 | length 64
  Top Layer w0.254: U5.13 9.779,180.721 11.684,182.626 13.716,182.626 v1(13.843,182.499)
  Bottom Layer w0.254: LD70.2 13.538,233.068 13.538,182.804 v1(13.843,182.499)
LED31: LD71.2 U5.14 | length 55.1
  Top Layer w0.254: U5.14 10.429,180.34 11.826,181.737 v1(12.573,181.737)
  Bottom Layer w0.254: LD71.2 13.081,226.525 13.081,185.166 12.573,184.658 v1(12.573,181.737)
LED32: LD72.2 U5.15 | length 47.9
  Top Layer w0.254: U5.15 11.079,179.862 v1@11.938,180.721 ; v1(12.192,180.467) v1@12.573,180.467
  Bottom Layer w0.254: LD72.2 12.446,220.16 12.446,185.801 11.608,184.963 11.608,181.051 v1(12.192,180.467)
LED33: LD73.2 U5.16 | length 43.5
  Top Layer w0.254: v1(11.303,176.784) 11.303,176.911 11.729,177.337 U5.16
  Bottom Layer w0.254: LD73.2 11.938,213.668 11.938,186.182 11.151,185.395 11.151,176.936 v1(11.303,176.784)
LED34: LD74.2 U5.17 | length 39.8
  Top Layer w0.254: v1(11.303,175.387) 11.303,175.641 11.481,175.819 11.523,175.819 12.379,176.675 U5.17
  Bottom Layer w0.254: LD74.2 11.43,207.176 11.43,186.563 10.465,185.598 10.465,176.437 11.083,175.819 11.125,175.819 11.303,175.641 v1(11.303,175.387)
LED35: LD75.2 U5.18 | length 35
  Top Layer w0.254: v1(12.827,175.895) 13.029,176.097 U5.18
  Bottom Layer w0.254: LD75.2 10.922,200.684 10.922,186.944 10.008,186.03 10.008,175.497 10.956,174.549 11.65,174.549 12.827,175.726 v1(12.827,175.895)
LED36: LD76.2 U5.19 | length 30.2
  Top Layer w0.254: U5.19 13.679,175.17 v1(13.843,175.006)
  Bottom Layer w0.254: LD76.2@9.054,195.622 10.287,194.389 10.287,187.198 9.525,186.436 9.525,175.133 10.566,174.092 11.913,174.092 12.827,175.006 v1(13.843,175.006)
LED37: LD77.2 U5.20 | length 24.6
  Top Layer w0.254: U5.20 14.329,176.552 v1(14.732,176.149)
  Bottom Layer w0.254: LD77.2 9.054,174.957 10.402,173.609 12.065,173.609 12.573,174.117 14.351,174.117 14.732,174.498 v1(14.732,176.149)
LED_B: R14.1 U1.18 | length 55.8
  Top Layer w0.203: v1(1.651,122.047) 1.905,122.047 2.667,121.285 9.652,121.285 R14.1 ; v1(1.778,144.272) 1.27,144.272 0.354,145.188 0.354,157.484 0.948,158.078 U1.18
  Bottom Layer w0.203: v1(1.651,122.047) 1.651,122.301 1.524,122.428 1.651,122.555 1.651,125.73 4.572,128.651 4.572,140.97 1.778,143.764 v1(1.778,144.272)
LED_R: R12.1 U1.16 | length 49.7
  Top Layer w0.203: v1(1.27,120.523) 3.238,120.523 R12.1 ; v1(1.779,158.878) U1.16
  Bottom Layer w0.203: v1(1.27,120.523) 0.735,121.058 0.735,126.211 4.064,129.54 4.064,140.689 0.735,144.018 0.735,157.834 v1(1.779,158.878)
MCU_I2C_SCL: R38.2 U1.40 | length 14.5
  Top Layer w0.203: U1.40 11.652,156.878 13.018,158.244 13.018,164.401 14.732,166.116 15.137,166.116 15.875,166.854 R38.2
MCU_I2C_SDA: R37.2 U1.41 | length 13.2
  Top Layer w0.203: U1.41 11.513,157.278 12.573,158.338 12.573,164.719 14.351,166.497 R37.2
MCU_IO_EXP0_RST: R36.2 U1.42 | length 12.1
  Top Layer w0.203: U1.42 11.374,157.678 12.192,158.496 12.192,166.751 R36.2
MCU_IO_EXP1_RST: R35.2 U1.43 | length 11.3
  Top Layer w0.203: U1.43 11.17,158.078 11.811,158.719 11.811,166.878 R35.2
MCU_SENSOR_INT0: R34.2 U1.44 | length 11
  Top Layer w0.203: U1.44 10.777,158.478 11.43,159.131 11.43,165.1 9.779,166.751 R34.2
MCU_SENSOR_INT1: R39.2 U1.5 | length 9.2
  Top Layer w0.203: R39.2 2.159,166.878 5.588,163.449 5.588,162.306 5.842,162.052 6.858,162.052 7.198,161.712 U1.5
MCU_SPI_CS: R30.2 U1.48 | length 12.2
  Top Layer w0.203: R30.2 3.683,166.751 4.191,166.243 5.588,166.243 6.477,165.354 8.89,165.354 9.906,164.338 9.906,160.361 U1.48
MCU_SPI_SDI: R32.2 U1.46 | length 11.5
  Top Layer w0.203: R32.2 6.731,167.005 7.62,166.116 9.271,166.116 10.668,164.719 10.668,159.639 10.307,159.278 U1.46
MCU_SPI_SDO: R31.2 U1.47 | length 11.7
  Top Layer w0.203: R31.2 6.858,165.735 9.048,165.735 10.287,164.496 10.287,159.832 10.133,159.678 U1.47
MCU_SPI_SPC: R33.2 U1.45 | length 11.2
  Top Layer w0.203: R33.2 8.255,167.005 8.763,166.497 9.429,166.497 11.049,164.877 11.049,159.385 10.542,158.878 U1.45
NetANT1_1: ANT1.1 R18.1 | length 14.7
  Top Layer w0.762: ANT1.1 5.842,140.208 8.636,143.002 8.636,146.939 7.175,148.399 R18.1
NetBT1_2: BT1.2 BT2.1 | length 38.8
  Top Layer w0.508: BT1.2@1.27,85.725 BT1.2@7.747,85.725 ; BT2.1@10.287,60.96 BT2.1@16.764,60.96
  Bottom Layer w0.508: BT1.2@7.747,85.725 7.747,72.263 10.287,69.723 BT2.1@10.287,60.96
NetC2_1: C2.1 U1.29 | length 3.4
  Top Layer w0.203: C2.1@4.064,152.654 4.826,153.416 5.588,153.416 5.998,153.826 U1.29
NetC3_1: C3.1 U1.30 U7.3 | length 3.4
  Top Layer w0.203: C3.1 6.223,152.654 ; U1.30 6.398,153.687 6.223,153.512 6.223,152.654 ; U7.3 6.223,152.654
NetC4_2: C4.2 R18.2 R19.2 U7.5 | length 11.3
  Top Layer w0.254: U7.5 6.989,150.745 8.572,149.161 R18.2
  Top Layer w0.762: R18.2 9.779,147.764 9.779,144.399 10.858,143.32 R19.2
NetC7_1: C7.1 U1.39 | length 9.9
  Top Layer w0.203: U1.39 11.825,156.478 13.462,158.115 13.462,161.163 14.478,162.179 C7.1
NetC18_1: C18.1 C20.1 L1.2 L2.1 R9.2 | length 8.3
  Top Layer w0.508: L1.2 C18.1@9.144,42.244 ; C18.1 C18.1@9.144,42.244 ; R9.2 11.176,44.387 C20.1 L2.1 9.144,44.45 C18.1@9.144,42.244
NetC20_2: C20.2 R9.1 R10.2 U2.4 | length 8.8
  Top Layer w0.508: U2.4 9.586,38.923 10.033,39.37 11.684,39.37 12.7,40.386 R10.2 R9.1@12.7,42.418 ; C20.2 12.573,44.387 R9.1
NetCN1_1: CN1.1 SB01.1 | length 7.1
  Top Layer w0.508: SB01.1 6.89,11.398 7.403,10.885 CN1.1
NetL1_1: L1.1 U2.5 | length 2.6
  Top Layer w0.4: L1.1@7.62,40.894 7.686,40.828 U2.5
NetLD0_2: LD0.2 R12.2 | length 2.6
  Top Layer w0.508: R12.2 6.286,116.078 LD0.2
NetLD1_2: LD1.2 R14.2 | length 2.8
  Top Layer w0.508: LD1.2 13.208,116.078 R14.2
NetLD40_1: LD40.1 RP0.1 | length 12.7
  Top Layer w0.381: LD40.1 11.176,406.224 11.176,399.415 12.624,397.967 RP0.1
NetLD41_1: LD41.1 RP0.2 | length 6.9
  Top Layer w0.381: LD41.1 10.414,399.986 10.414,398.78 12.027,397.167 RP0.2
NetLD42_1: LD42.1 RP0.3 | length 5.2
  Top Layer w0.381: LD42.1 10.967,396.367 RP0.3
NetLD43_1: LD43.1 RP0.4 | length 11
  Top Layer w0.381: LD43.1 10.795,389.195 10.795,394.716 11.646,395.567 RP0.4
NetLD44_1: LD44.1 RP1.1 | length 12.9
  Top Layer w0.381: LD44.1 11.557,377.843 11.557,370.84 12.624,369.773 RP1.1
NetLD45_1: LD45.1 RP1.2 | length 7.1
  Top Layer w0.381: LD45.1 10.668,371.732 10.668,370.332 12.027,368.973 RP1.2
NetLD46_1: LD46.1 RP1.3 | length 5.1
  Top Layer w0.381: LD46.1 10.773,368.173 RP1.3
NetLD47_1: LD47.1 RP1.4 | length 10.7
  Top Layer w0.381: LD47.1 10.795,361.195 10.795,366.395 11.773,367.373 RP1.4
NetLD50_1: LD50.1 RP2.1 | length 13.2
  Top Layer w0.381: LD50.1 11.303,350.097 11.303,342.773 12.459,341.617 RP2.1
NetLD51_1: LD51.1 RP2.2 | length 7.4
  Top Layer w0.381: LD51.1 10.668,343.732 10.668,341.884 11.735,340.817 RP2.2
NetLD52_1: LD52.1 RP2.3 | length 5.1
  Top Layer w0.381: LD52.1 10.617,340.017 RP2.3
NetLD53_1: LD53.1 RP2.4 | length 10.5
  Top Layer w0.381: LD53.1 10.668,333.068 10.668,337.947 11.938,339.217 RP2.4
NetLD54_1: LD54.1 RP3.1 | length 13.3
  Top Layer w0.381: LD54.1 9.356,324.4 11.557,322.199 11.557,314.706 12.713,313.55 RP3.1
NetLD55_1: LD55.1 RP3.2 | length 7.4
  Top Layer w0.381: LD55.1 10.668,315.732 10.668,313.817 11.735,312.75 RP3.2
NetLD56_1: LD56.1 RP3.3 | length 5
  Top Layer w0.381: LD56.1 10.55,311.95 RP3.3
NetLD57_1: LD57.1 RP3.4 | length 10
  Top Layer w0.381: LD57.1 10.922,305.322 10.922,309.372 12.7,311.15 RP3.4
NetLD60_1: LD60.1 RP4.1 | length 15.5
  Top Layer w0.381: LD60.1 7.493,294.893 7.493,292.354 8.509,291.338 10.033,291.338 11.43,289.941 11.43,286.385 12.243,285.572 RP4.1
NetLD61_1: LD61.1 RP4.2 | length 7.6
  Top Layer w0.381: LD61.1 10.541,287.859 10.541,285.623 11.392,284.772 RP4.2
NetLD62_1: LD62.1 RP4.3 | length 5
  Top Layer w0.381: LD62.1 10.572,283.972 RP4.3
NetLD63_1: LD63.1 RP4.4 | length 10.2
  Top Layer w0.381: LD63.1 10.668,277.068 10.668,281.432 12.408,283.172 RP4.4
NetLD64_1: LD64.1 RP5.1 | length 15.1
  Top Layer w0.381: LD64.1 9,268.334 7.493,266.827 7.493,264.541 8.509,263.525 9.779,263.525 11.557,261.747 11.557,258.445 12.243,257.759 RP5.1
NetLD65_1: LD65.1 RP5.2 | length 7.2
  Top Layer w0.381: LD65.1 10.668,259.732 10.668,258.064 11.773,256.959 RP5.2
NetLD66_1: LD66.1 RP5.3 | length 5.1
  Top Layer w0.381: LD66.1 10.759,256.159 RP5.3
NetLD67_1: LD67.1 RP5.4 | length 10.1
  Top Layer w0.381: LD67.1 10.668,249.068 10.668,253.238 12.789,255.359 RP5.4
NetLD70_1: LD70.1 RP6.1 | length 13.1
  Top Layer w0.381: LD70.1 11.43,237.97 11.43,230.632 12.37,229.692 RP6.1
NetLD71_1: LD71.1 RP6.2 | length 7.4
  Top Layer w0.381: LD71.1 9.17,233.4 10.668,231.902 10.668,229.997 11.773,228.892 RP6.2
NetLD72_1: LD72.1 RP6.3 | length 5.1
  Top Layer w0.381: LD72.1 10.692,228.092 RP6.3
NetLD73_1: LD73.1 RP6.4 | length 10.3
  Top Layer w0.381: LD73.1 11.176,221.576 11.176,226.06 12.408,227.292 RP6.4
NetLD74_1: LD74.1 RP7.1 | length 13.1
  Top Layer w0.381: LD74.1 11.811,209.589 11.811,202.311 12.535,201.587 RP7.1
NetLD75_1: LD75.1 RP7.2 | length 7.3
  Top Layer w0.381: LD75.1 9.357,205.4 11.049,203.708 11.049,202.057 12.319,200.787 RP7.2
NetLD76_1: LD76.1 RP7.3 | length 5.2
  Top Layer w0.381: LD76.1 9.017,198.628 10.376,199.987 RP7.3
NetLD77_1: LD77.1 RP7.4 | length 10.4
  Top Layer w0.381: LD77.1 9.054,193.331 11.049,195.326 11.049,198.247 11.989,199.187 RP7.4
NetR4_1: R4.1 U3.2 | length 7.9
  Top Layer w0.203: U3.2 7.347,23.133 8.509,21.971 11.43,21.971 R4.1
NetR5_1: R5.1 U3.4 | length 7.2
  Top Layer w0.203: U3.4 8.147,24.492 8.763,23.876 12.573,23.876 R5.1
NetR6_1: R6.1 U3.9 | length 2.5
  Top Layer w0.203: U3.9 7.347,29.572 R6.1
NetR17_2: R17.2 R19.1 | length 35.2
  Top Layer w1.27: R19.1@11.938,141.732 17.018,141.732 ; 13.589,135.128 13.589,128.905 13.843,128.651 16.891,128.651 17.018,128.524 17.018,141.732 ; 13.716,145.796 16.637,145.796 17.018,145.415 17.018,141.732
NetSB02_1: SB02.1 U3.10 | length 3
  Top Layer w0.203: SB02.1 5.588,29.337 6.947,27.978 U3.10
NetU1_31: U1.31 U7.1 | length 1.6
  Top Layer w0.203: U7.1 6.798,153.313 U1.31
NetU1_32: U1.32 U7.2 | length 1.6
  Top Layer w0.203: U1.32 7.198,153.295 U7.2
PG_STAT: P1.3 P2.3 R8.2 U1.20 U3.5 | length 154.6
  Top Layer w0.203: v1(2.159,146.812) 1.116,147.855 1.116,156.722 1.672,157.278 U1.20 ; v1(11.43,27.813) 9.033,25.416 U3.5 8.547,24.981 9.144,24.384 13.716,24.384 R8.2
  Bottom Layer w0.203: v1(2.159,146.812) 3.175,146.812 4.064,145.923 4.064,143.318 6.096,141.286 6.096,127.508 3.556,124.968 3.556,108.839 6.477,105.918 P1.3 P2.3 6.477,97.536 3.556,94.615 3.556,35.814 7.366,32.004 10.033,32.004 11.43,30.607 v1(11.43,27.813)
SENSOR_INT0: R34.1 U6.9 | length 244.6
  Top Layer w0.305: v1(3.429,391.414) 3.429,394.462 6.223,397.256 6.223,402.971 5.445,403.749 U6.9 ; v1(9.525,170.053) 9.525,169.037 R34.1
  Bottom Layer w0.305: v1(3.429,391.414) 2.666,390.651 2.666,172.425 4.022,171.069 6.477,171.069 7.62,172.212 8.462,172.212 8.944,171.729 9.119,171.729 9.525,171.323 v1(9.525,170.053)
SENSOR_INT1: R39.1 U6.11 | length 242.2
  Top Layer w0.254: R39.1 2.159,170.053 2.794,170.688 2.667,170.815 v1(2.667,171.069)
  Top Layer w0.305: v1(4.572,393.446) 6.858,395.732 6.858,402.082 8.001,403.225 8.001,404.114 7.366,404.749 U6.11
  Bottom Layer w0.305: v1(2.667,171.069) 2.183,171.553 2.183,392.073 3.556,393.446 v1(4.572,393.446)
SPI_CS: R30.1 U6.8 | length 237.1
  Top Layer w0.305: v1(3.048,396.748) 4.183,397.883 U6.8 ; v1(3.429,169.799) 3.683,169.545 R30.1
  Bottom Layer w0.305: v1(3.048,396.748) 1.701,395.401 1.701,170.638 2.54,169.799 v1(3.429,169.799)
SPI_SDI: R32.1 U6.6 | length 244.4
  Top Layer w0.254: v1(1.397,398.272) 3.183,400.058 U6.6 ; v1(6.223,170.053) 6.731,169.545 R32.1
  Bottom Layer w0.254: v1(1.397,398.272) 1.397,397.764 0.812,397.179 0.812,169.241 2.032,168.021 5.715,168.021 6.223,168.529 v1(6.223,170.053)
SPI_SDO: R31.1 U6.7 | length 241.3
  Top Layer w0.254: v1(2.921,398.526) 3.683,399.288 U6.7 ; v1(4.826,170.053) 5.207,169.672 R31.1
  Bottom Layer w0.254: v1(2.921,398.526) 2.921,398.018 1.243,396.34 1.243,169.699 2.286,168.656 4.064,168.656 4.826,169.418 v1(4.826,170.053)
SPI_SPC: R33.1 U6.4 | length 247.8
  Top Layer w0.254: v1(0.889,399.796) 0.889,401.574 1.778,402.463 1.778,403.987 2.04,404.249 U6.4 ; v1(7.62,170.053) 8.255,169.418 R33.1
  Bottom Layer w0.254: v1(0.889,399.796) 0.38,399.287 0.38,168.784 1.778,167.386 6.223,167.386 7.62,168.783 v1(7.62,170.053)
SWDCLK: J1.4 R1.2 U1.24 | length 38.2
  Top Layer w0.203: U1.24 3.024,155.678 2.642,155.296 2.642,149.216 6.061,145.796 v1(6.985,145.796) ; J1.4 R1.2
  Bottom Layer w0.203: v1(6.985,145.796) 7.899,144.882 7.899,123.8 J1.4
SWDIO: J1.3 U1.23 | length 42
  Top Layer w0.203: U1.23 2.789,156.078 2.259,155.548 2.259,149.059 6.794,144.524 6.794,144.463 v1(6.985,144.272)
  Bottom Layer w0.203: v1(6.985,144.272) 7.366,143.891 7.366,125.222 6.985,124.841 6.985,122.936 8.128,121.793 10.16,121.793 10.795,122.428 J1.3
TEST_GPIO0: J20.1 U1.28 | length 9.2
  Top Layer w0.203: J20.1 4.699,148.59 3.404,149.885 3.404,153.614 3.587,153.797 5.334,153.797 5.598,154.061 U1.28
TEST_GPIO1: J21.1 U1.27 | length 11.1
  Top Layer w0.203: U1.27 5.198,154.296 5.08,154.178 3.429,154.178 3.023,153.772 3.023,149.504 5.072,147.455 J21.1
U5V: C15.1 D2.1 D3.1 J6.1 SB01.2 U3.1 | length 17.7
  Top Layer w0.203: U3.1 6.947,21.12 J6.1
  Top Layer w0.508: J6.1 10.477,19.939 C15.1 11.303,19.113 D2.1 D3.1 SB01.2
UART_RX: CN1.3 P1.4 P2.4 U1.21 | length 165.1
  Top Layer w0.203: U1.21 1.811,156.878 1.497,156.564 1.497,148.682 4.064,146.115 4.064,144.653 v1(5.588,143.129) ; CN1.3 9.003,9.384 v1(10.922,11.303)
  Bottom Layer w0.203: v1(5.588,143.129) 6.604,142.113 6.604,126.873 4.064,124.333 4.064,110.363 9.017,105.41 P1.4 P2.4 9.017,98.044 4.064,93.091 4.064,43.053 13.487,33.63 13.487,13.868 v1(10.922,11.303)
UART_TX: CN1.2 P1.5 P2.5 U1.22 | length 171.8
  Top Layer w0.203: U1.22 2.3,156.478 1.878,156.056 1.878,148.84 5.207,145.511 v1(5.207,144.78) v1@5.207,144.653 ; CN1.2 8.203,10.616 v1(8.763,11.176)
  Bottom Layer w0.203: v1(5.207,144.78) 6.985,143.002 6.985,126.619 4.572,124.206 4.572,111.506 11.557,104.521 P1.5 P2.5 11.557,97.282 9.398,95.123 6.731,95.123 4.572,92.964 4.572,43.688 14.478,33.782 14.478,12.573 12.065,10.16 9.779,10.16 v1(8.763,11.176)
VBAT: B0.1 BT1.1 C16.1 C17.1 R2.2 SB02.2 U2.1 U2.3 | length 58.9
  Top Layer w0.254: 5.143,32.004 5.143,32.322 7.686,34.864 U2.1 ; SB02.2 5.588,32.131 7.112,33.655 9.017,33.655 9.586,34.224 U2.3
  Top Layer w0.508: BT1.1@1.27,60.96 7.747,60.96 5.842,59.055 5.842,37.338 3.81,35.306 R2.2 C16.1 C17.1 ; B0.1 4.318,27.94 3.175,29.083 C17.1 ; SB02.2 5.143,32.004 C17.1
XC1: C9.2 J5.1 U1.37 X1.2 | length 10.4
  Top Layer w0.203: U1.37 12.978,155.678 X1.2 15.367,150.114 J5.1
XC2: C8.2 J4.1 U1.38 X1.1 | length 9.9
  Top Layer w0.203: U1.38 12.856,156.078 X1.1 C8.2 J4.1
pads on no net: CN1.0 J1.5 U1.2 U1.3 U1.4 U1.6 U1.7 U1.8 U1.10 U1.11 U1.15 U1.17 U1.25 U1.26 U3.6 U3.7

## Polygon pours and split planes (outlines as drawn)
GND on Bottom Layer "Bottom Layer-No Net" (solid, remove dead copper, pour order 16): 0,0 18,0 18,410 0,410
GND on Top Layer "Bottom Layer-No Net" (solid, remove dead copper, pour order 18): 0,0 18,0 18,409.956 0.044,409.956 0,410

## Keep-outs
Keep-Out Layer:
  lines w0.15: 0,0 0,410 18,410 18,0 0,0
  lines w0.254: 17.746,410 18.254,410 ; 18,409.746 18,410.254
  text "18,410 (mm)" at 18.254,410 h1.52

## Other copper
Multi-Layer:
  pour cut-out: 18,147.066 10.668,147.066 10.668,127 18,127
  pour cut-out: 3.556,141.605 1.778,141.605 -0.127,141.605 -0.127,132.207 3.556,132.207

## Silkscreen, mask and mechanical layers (free items; w line width, h text height)
Top Overlay:
  lines w0.254: 17.746,160 18.254,160 ; 17.746,200 18.254,200 ; 18,159.746 18,160.254 ; 18,199.746 18,200.254 ; 20.508,404.471 21,406 ; 20.746,405.997 21.254,406.003 ; 21.524,404.481 21,406 ; 21.919,317.27 21,406 ; 22.081,301.73 23,213 ; 22.476,214.519 23,213 ; 22.746,212.997 23.254,213.003 ; 23.492,214.529 23,213
  text "193.01 (mm)" at 21.008,317.006 h1.52 r270.59
  text "18,200 (mm)" at 18.254,200 h1.52
  text "18,160 (mm)" at 18.254,160 h1.52

## Text inside footprints (layer, text, board x,y; h text height)
BT1: Top Overlay "+" at 5.207,55.499 h1.27 r90
BT2: Top Overlay "+" at 14.224,55.499 h1.27 r90
LD0: Top Overlay "+" at 9.144,118.173 h0.76 r90
LD1: Top Overlay "+" at 10.922,118.173 h0.76 r90